# Altium PCB HOC_LENH_STM8S.PcbDoc
Units mm, origin at the board's own origin, x right, y up, seen from the top; angles counter-clockwise.
Board outline 68.96 x 54.48 mm, 2 copper layers (Top Layer, Bottom Layer); 28 components, 22 nets, 97 pads, 12 vias.
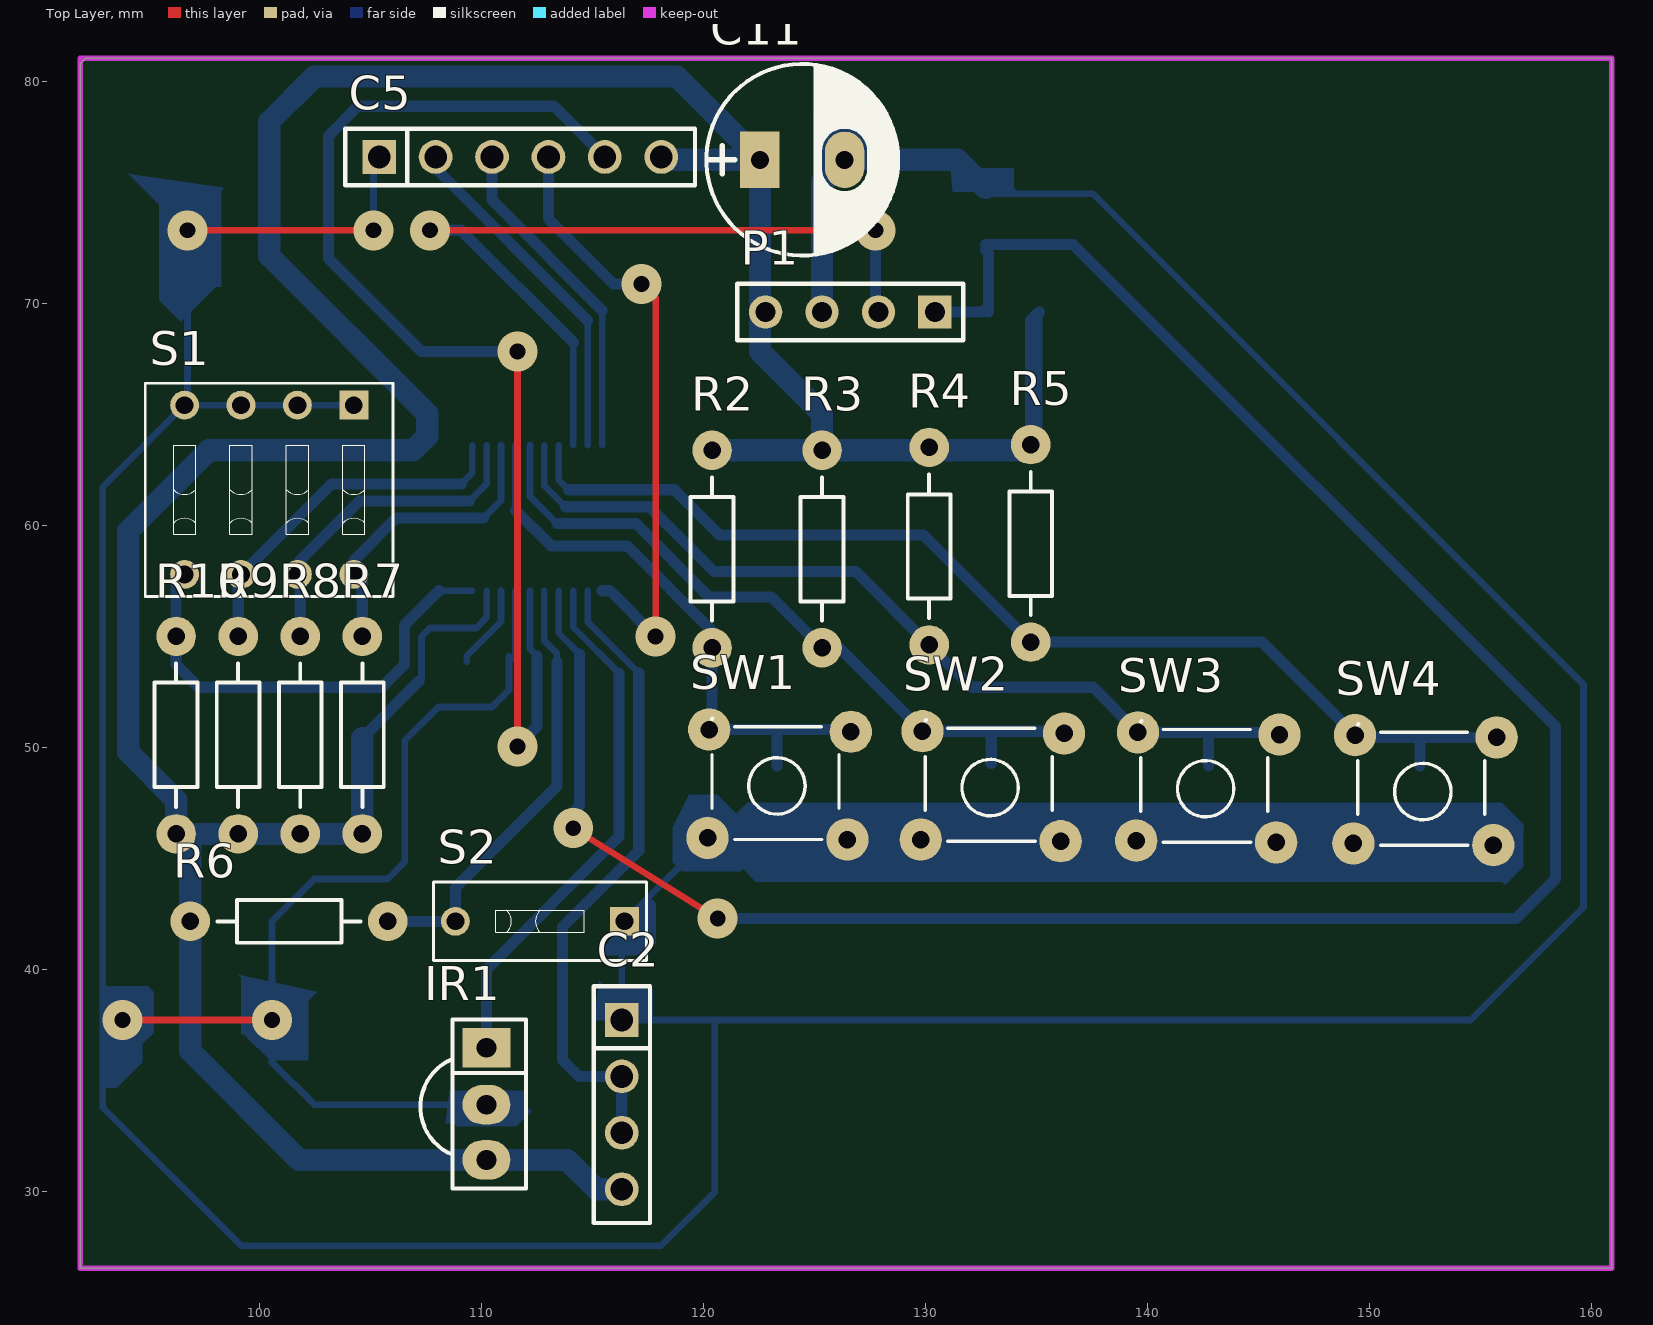
[diagram p0: Top Layer view]
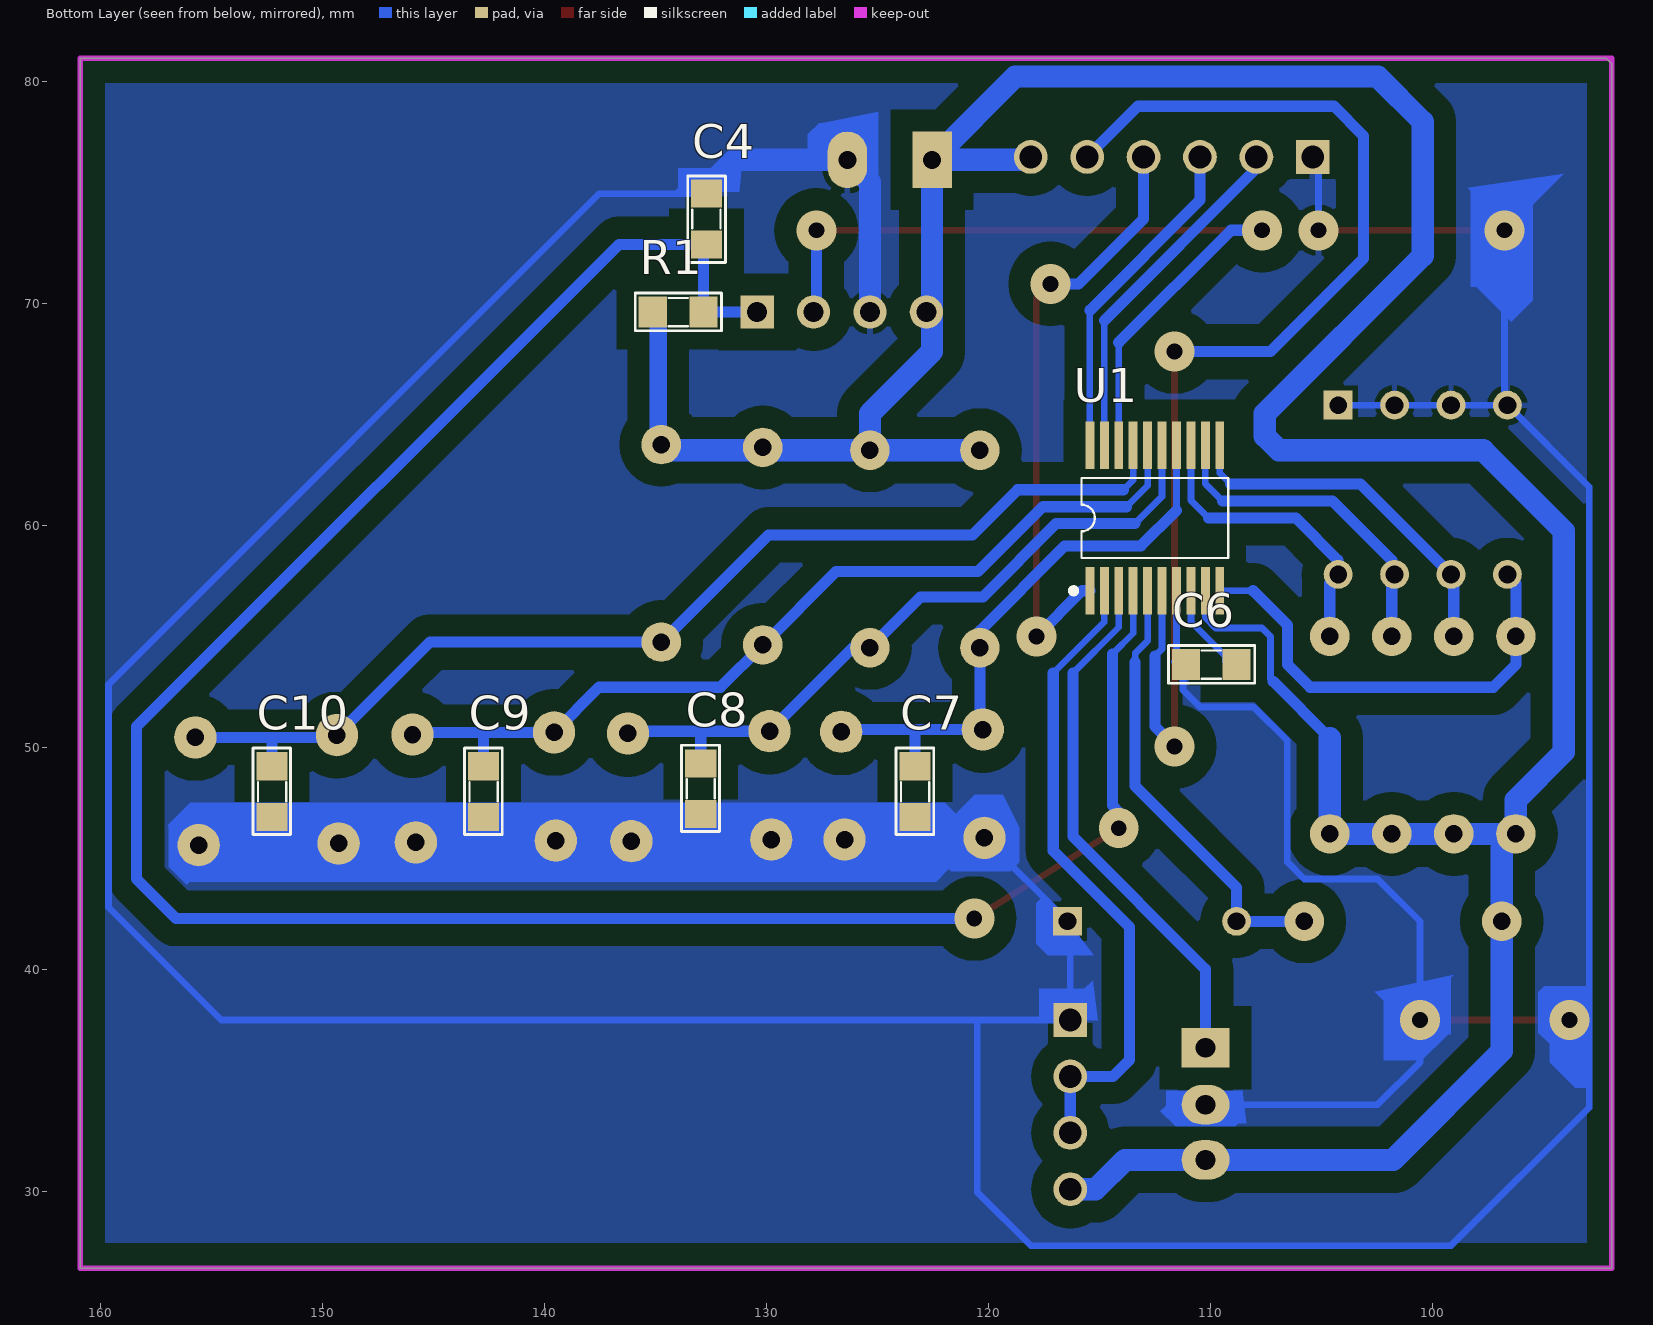
[diagram p1: Bottom Layer view, seen from below]
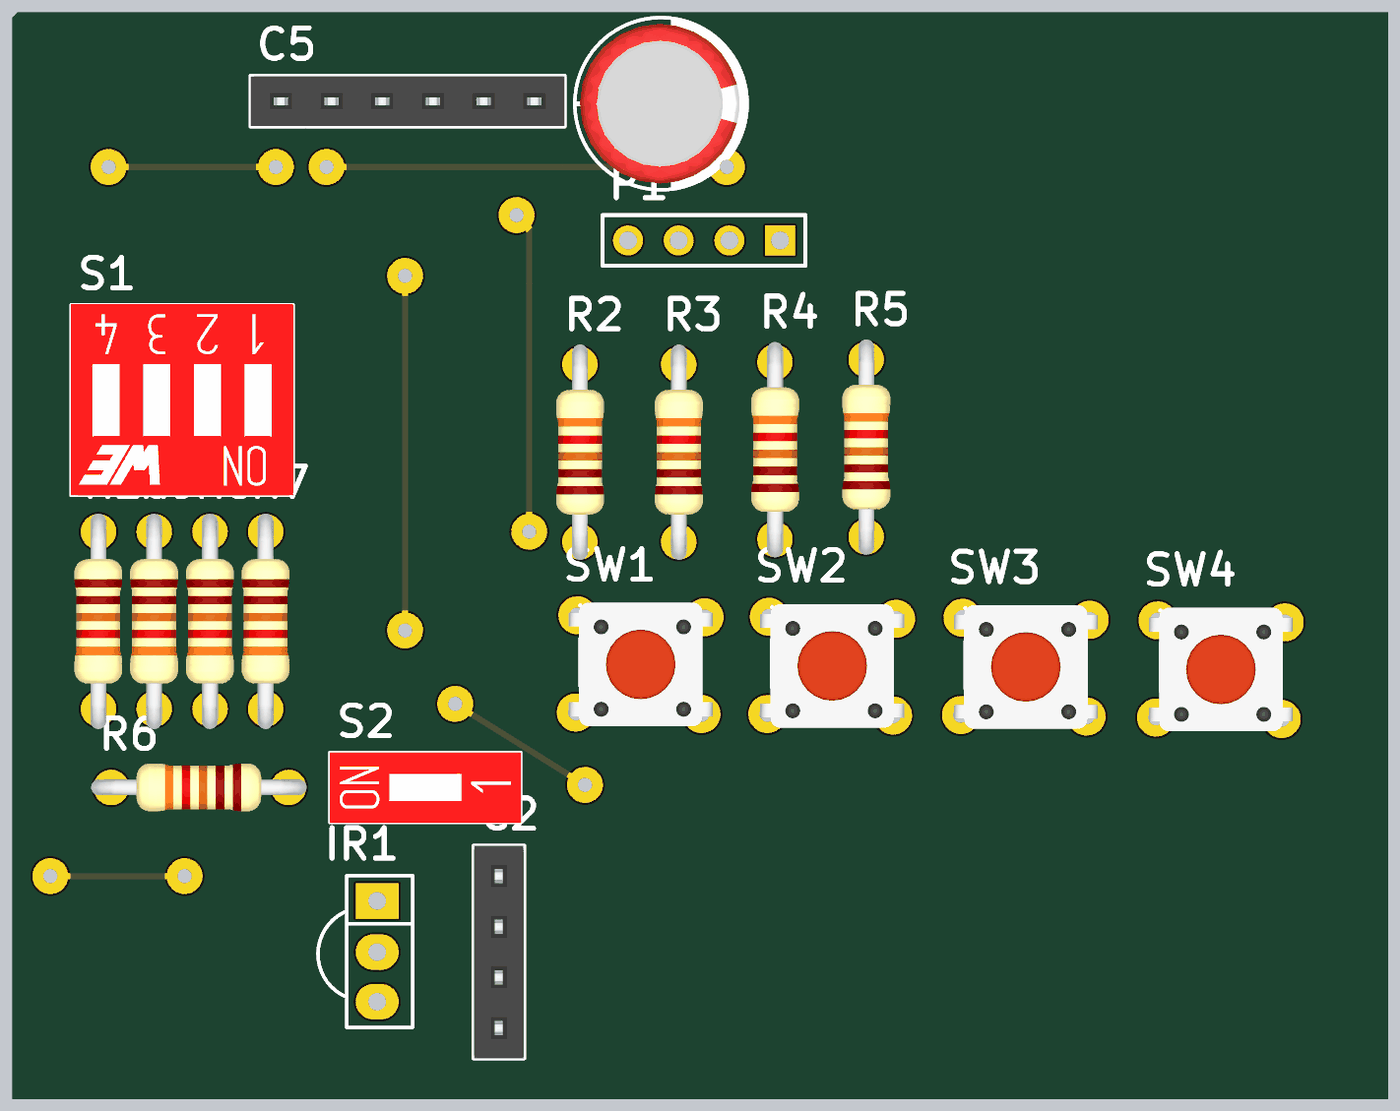
[diagram p2: 3D render of the assembled board from above, using the file's embedded part models]
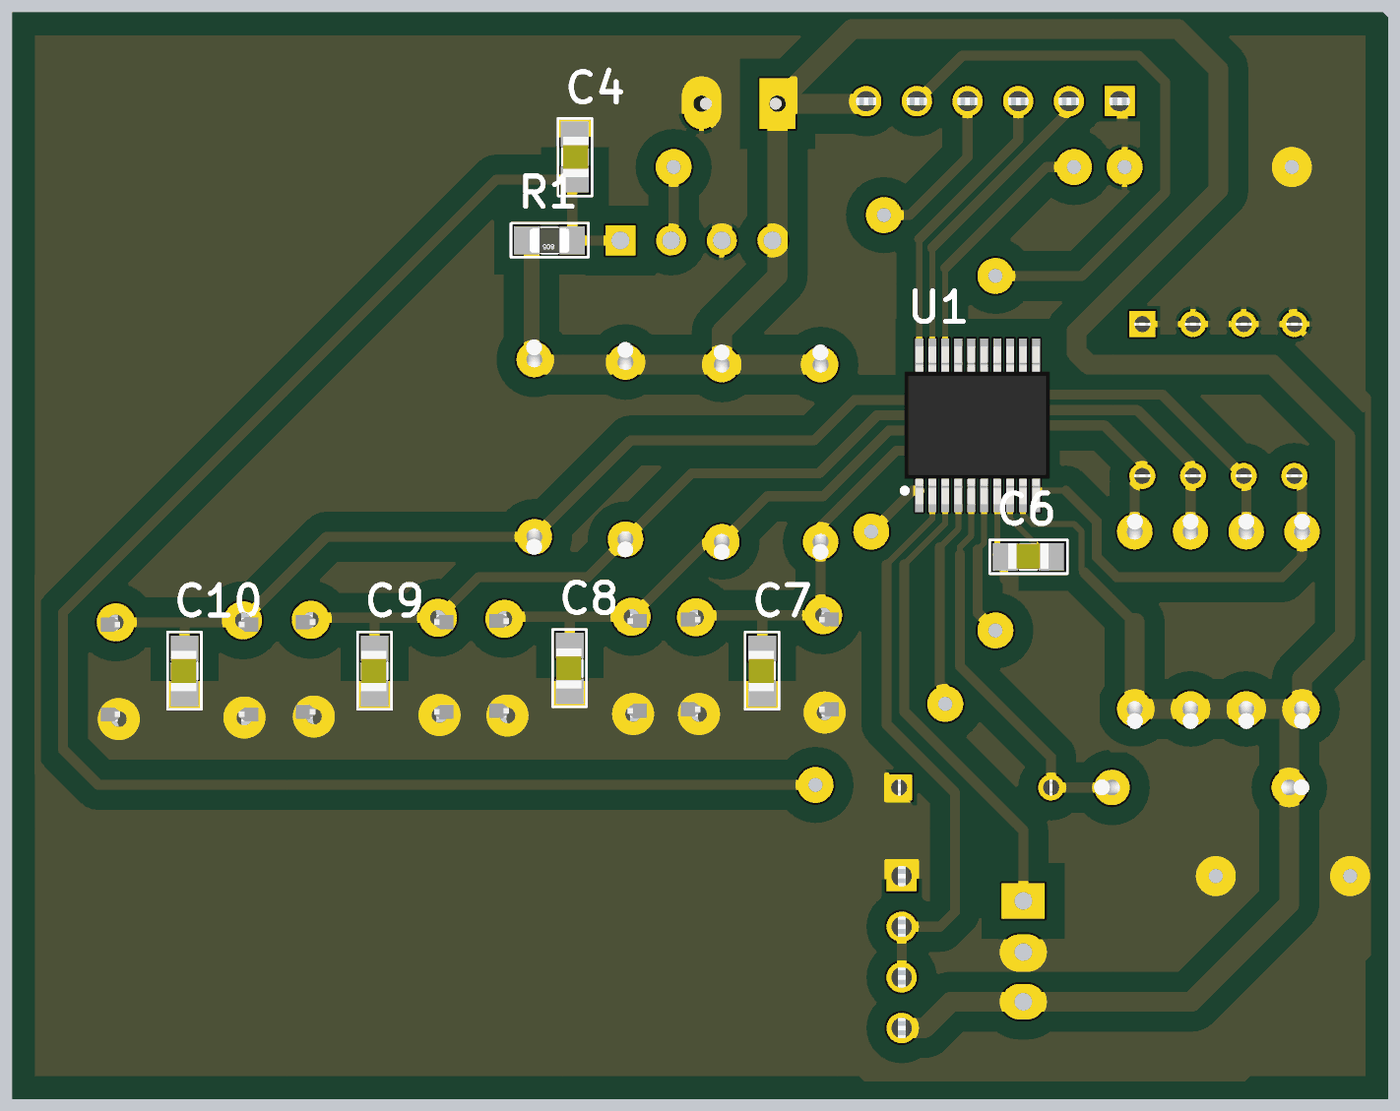
[diagram p3: 3D render of the assembled board from below, using the file's embedded part models]

## Layer stack, top to bottom
Top Solder: solder mask 0.0102, Solder Resist, Dk 3.5
Top Layer: signal copper 0.0356
Dielectric 1: dielectric 0.32, FR-4, Dk 4.8
Bottom Layer: signal copper 0.0356
Bottom Solder: solder mask 0.0102, Solder Resist, Dk 3.5

## Board outline
91.948,26.543 91.948,80.772 92.202,81.026 160.909,81.026 160.909,26.543

## Design rules (kind name [scope] priority, off if disabled: settings)
Clearance [All] p1: gap=0.2 ignorepadtopadclearanceinfootprint=FALSE
PolygonConnect [All] p1: connectstyle=Relief reliefconductorwidth=0.254 reliefentries=4 polygonreliefangle="90 Angle" airgapwidth=0.254
RoutingVias [All] p1: holewidth=0.711 width=1.8 viastyle="Through Hole" minholewidth=0.711 minwidth=1.8 maxholewidth=0.711 maxwidth=1.8
SolderMaskExpansion [All] p1: expansion=0.102
Width [All] p1: maxlimit=1 minlimit=0.3 preferedwidth=0.5
30 further rules are at their usual default settings.

## Components (designator, comment, footprint, x,y, rotation, side; value= is the part's Value field where it differs from the comment)
C2 "JP4" JP4-C1T 116.332,37.719 r270 top
C4 "104" 0805 132.715,73.787 r90 bottom value=103
C5 "JP6" JP6-C1T 105.41,76.581 r0 top
C6 "104" 0805 109.982,53.721 r0 bottom value=103
C7 "104" 0805 123.317,48.006 r270 bottom value=103
C8 "104" 0805 132.969,48.133 r270 bottom value=103
C9 "104" 0805 142.748,48.006 r270 bottom value=103
C10 "104" 0805 152.273,48.006 r270 bottom value=103
C11 "1000uF/16V" CP1.5/3.4 122.555,76.454 r0 top
IR1 "IR" IR 110.236,33.934 r270 top
P1 "Header 4" HDR1X4 130.429,69.596 r180 top
R1 "10k" SM-RES-0805 132.842,69.596 r0 bottom value="R1/4W - 1K"
R2 "10k" R1/4W 120.396,63.373 r270 top value="R1/4W - 1K"
R3 "10k" R1/4W 125.349,63.373 r270 top value="R1/4W - 1K"
R4 "10k" R1/4W 130.175,63.5 r270 top value="R1/4W - 1K"
R5 "10k" R1/4W 134.747,63.627 r270 top value="R1/4W - 1K"
R6 "10k" R1/4W 96.901,42.164 r0 top value="R1/4W - 1K"
R7 "10k" R1/4W 104.648,46.101 r90 top value="R1/4W - 1K"
R8 "10k" R1/4W 101.854,46.101 r90 top value="R1/4W - 1K"
R9 "10k" R1/4W 99.06,46.101 r90 top value="R1/4W - 1K"
R10 "10k" R1/4W 96.266,46.101 r90 top value="R1/4W - 1K"
S1 "=partNo" SW-DIP4 100.457,61.595 r180 top
S2 "=partNo" SW-DIP1-1 112.649,42.164 r90 top
SW1 "SW" SW4 126.492,45.847 r180 top value="Button chip 4 pin"
SW2 "SW" SW4 136.093,45.771 r180 top value="Button chip 4 pin"
SW3 "SW" SW4 145.796,45.72 r180 top value="Button chip 4 pin"
SW4 "SW" SW4 155.575,45.593 r180 top value="Button chip 4 pin"
U1 "STM8S003F3" SSOP20 112.522,60.325 r180 bottom

## Footprints (in the part's own frame and the unit in brackets; to place one, negate y for a bottom-side part, rotate by r counter-clockwise, add the part's x,y. Pads: shape width x height; smd on the part's side, far side on the other; paste and mask are expansions set on the pad)
0805 [mil] "Compoment SMD 80x50mil"
  rect 50x55 smd: 1(-45,0) 2(45,0)
  silkscreen extent -77,-34 76,33, body extent -40,-27 40,23, height 24
CP1.5/3.4 [mil] "Tu hoa 220->470uF,16V, 470uF/16V,25V"
  rect 70x100 hole 32: 1(0,0)
  oval 70x100 hole 32: 2(150,0)
  silkscreen extent -95,-170 245,170, body extent -85,-157 230,157, height 446
HDR1X4 [mm] "Connector; Header; 4 Position"
  rect 1.5x1.5 hole 0.9: 1(0,0)
  round 1.5 hole 0.9: 2(2.54,0) 3(5.08,0) 4(7.62,0)
  silkscreen extent -1.27,-1.27 8.89,1.27, body extent -1.27,-1.27 8.89,1.27, height 7
IR [mil] "Receiver Infared IC"
  rect 70x85 hole 35: 1(-100,0)
  oval 70x85 hole 35: 2(1,0) 3(99,0)
  silkscreen extent -150,-117 150,70
JP4-C1T [mm] "4 row, straight, gold plating"
  rect 1.52x1.52 hole 1.02: 1(0,0)
  round 1.52 hole 1.02: 2(2.54,0) 3(5.08,0) 4(7.62,0)
  silkscreen extent -1.52,-1.27 9.14,1.27, body extent -1.52,-1.25 9.14,1.25, height 8.51
JP6-C1T [mm] "6 row, straight, gold plating"
  rect 1.52x1.52 hole 1.02: 1(0,0)
  round 1.52 hole 1.02: 2(2.54,0) 3(5.08,0) 4(7.62,0) 5(10.16,0) 6(12.7,0)
  silkscreen extent -1.52,-1.27 14.22,1.27, body extent -1.52,-1.25 14.22,1.25, height 8.51
R1/4W [mil] "R 1/4W, 2 Pin, 350mil"
  round 70 hole 31: 1(0,0) 2(350,0)
  silkscreen extent 48,-38 302,38, body extent -40,-47 386,47, height 111
SM-RES-0805 [mil]
  rect 50x55 smd: 1(0,0) 2(90,0)
  silkscreen extent -32,-34 121,33, body extent 6,-25 84,25, height 31
SSOP20 [mm] "(STM8S003)"
  rect 0.4x2.15 smd: 1(-2.925,-3.275) 2(-2.275,-3.275) 3(-1.625,-3.275) 4(-0.975,-3.275) 5(-0.325,-3.275) 6(0.325,-3.275) 7(0.975,-3.275) 8(1.625,-3.275) 9(2.275,-3.275) 10(2.925,-3.275) 11(2.925,3.275) 12(2.275,3.275) 13(1.625,3.275) 14(0.975,3.275) 15(0.325,3.275) 16(-0.325,3.275) 17(-0.975,3.275) 18(-1.625,3.275) 19(-2.275,3.275) 20(-2.925,3.275)
  silkscreen extent -3.78,-3.4 3.3,1.8, body extent -3.68,-3.95 3.62,3.95, height 1.79
SW4 [mil] "SW button 4pin, 250 x250 mil"
  round 75 hole 31: 1(0,0) 2(245,-195) 3(248,-3) 4(-6,-191)
  silkscreen extent 15,-215 240,0, body extent -36,-220 276,24, height 276
SW-DIP1-1 [mm] "01p, 2.54mm Pitch, Horizontal, Box Type, THT, flat Actuator, red, without Tape, Tube"
  rect 1.3x1.3 hole 0.8: 1(0,-3.81)
  round 1.3 hole 0.8: 2(0,3.81)
  silkscreen extent -1.77,-4.8 1.77,4.8, body extent -1.77,-4.8 1.77,4.8, height 5.4
SW-DIP4 [mm] "04p, 2.54mm Pitch, Horizontal, Box Type, THT, flat Actuator, red, without Tape, Tube"
  rect 1.3x1.3 hole 0.8: 1(-3.81,-3.81)
  round 1.3 hole 0.8: 2(-1.27,-3.81) 3(1.27,-3.81) 4(3.81,-3.81) 5(3.81,3.81) 6(1.27,3.81) 7(-1.27,3.81) 8(-3.81,3.81)
  silkscreen extent -5.58,-4.8 5.58,4.8, body extent -5.58,-4.8 5.58,4.8, height 5.4

## Part data
C2: "WR-PHD 2.54 mm Angled Socket Header", Manufacturer="Würth Elektronik eiSos GmbH", partNo=613004143121, ComponentLink1 Description=Manufacturer, ComponentLink1URL=http://www.we-online.com, ComponentLink2 Description=Datasheet, ComponentLink2URL=http://katalog.we-online.de/em/datasheet/6130xx143121.pdf, Created by="Karrer Zheng", Created Date="29 March 2013", NoPins=04
C4 C6 C7 C8 C9 C10: library part CM, "Cap SMD"
C5: "WR-PHD 2.54 mm Angled Socket Header", Manufacturer="Würth Elektronik eiSos GmbH", partNo=613006143121, ComponentLink1 Description=Manufacturer, ComponentLink1URL=http://www.we-online.com, ComponentLink2 Description=Datasheet, ComponentLink2URL=http://katalog.we-online.de/em/datasheet/6130xx143121.pdf, Created by="Karrer Zheng", Created Date="29 March 2013", NoPins=06
C11: library part CP4, "Cap 1000uF/16V - 220uF/50V", Description 1="2200uF-3300uF/6,3V - 1000uF-2200uF/10V", Description 2="1000uF/16V - 470uF => 1000uF/25V - 100uF/100V", Description 3=330uF>470uF/35V_220uF>470uF/50V_10uF>22uF/250V, Description 4="220uF => 330uF/63V - 10uF =>33uF/160 - 200V", Description 5="4,7uF>10uF/250V_3,3uF>10uF/400V - 2,2uF>4,7uF/450V"
IR1: "Receiver Infraed IC"
P1: "Header, 4-Pin", LatestRevisionDate=17-Jul-2002, LatestRevisionNote="Re-released for DXP Platform.", Publisher="Altium Limited"
R1 R2 R3 R4 R5 R6 R7 R8 R9 R10: library part R1/4W, "Resistor 1/4W"
S1: library part SWDIP4, "WS-DITV 2.54 mm small compact THT flat actuator with top tape", Manufacturer="Wurth Elektronik", Part No.=418127160904, ComponentLink1 Description=Manufacturer, ComponentLink1URL=http://www.we-online.com, ComponentLink2 Description=Datasheet, ComponentLink2URL=http://katalog.we-online.de/em/datasheet/4181271609xx.pdf, Created by="Baojun Chen", Created Date=Dec.2015, Pole=04
S2: library part SWDIP1, "WS-DITV 2.54 mm small compact THT flat actuator with top tape", Manufacturer="Wurth Elektronik", Part No.=418127160901, ComponentLink1 Description=Manufacturer, ComponentLink1URL=http://www.we-online.com, ComponentLink2 Description=Datasheet, ComponentLink2URL=http://katalog.we-online.de/em/datasheet/4181271609xx.pdf, Created by="Baojun Chen", Created Date=Dec.2015, Pole=01
SW1 SW2 SW3 SW4: library part SW4, "Switch button 4 pin"

## Via types
v1: diameter 1.8, hole 0.711, Top Layer to Bottom Layer, 12 vias

## Nets (pads, with @x,y where several pads share a name; then routed paths per layer and width w, separated by ;. In a path a pad name is that pad's centre, name@x,y a point inside that pad or via, vN(x,y) a via of type N, cw(c..) or ccw(c..) an arc to the next point about the centre after c; other vN are vias at no path point)
"BUTTON 1": C7.1 R2.2 SW1.2 SW1.4 U1.14 | length 26.5
  Bottom Layer w0.3: 111.547,60.665 U1.14
  Bottom Layer w0.5: 111.547,60.665 113.157,59.055 116.586,59.055 120.396,55.245 R2.2 120.396,50.927 SW1.2 126.543,50.8 SW1.4 ; C7.1 123.317,50.711
"BUTTON 2": C8.1 R3.2 SW2.2 SW2.4 U1.15 | length 32.2
  Bottom Layer w0.3: U1.15 112.197,61.285 113.411,60.071
  Bottom Layer w0.5: 113.411,60.071 116.967,60.071 120.269,56.769 123.063,56.769 R3.2 126.111,54.483 SW2.2 132.969,50.724 ; C8.1 132.969,50.724 ; SW2.4 136.144,50.724 132.969,50.724
"BUTTON 3": C9.1 R4.2 SW3.2 SW3.4 U1.16 | length 41.1
  Bottom Layer w0.3: U1.16 112.847,61.778 113.792,60.833 ; 142.621,50.673 142.748,50.546
  Bottom Layer w0.5: 113.792,60.833 117.561,60.833 120.482,57.912 126.873,57.912 R4.2 132.08,52.705 137.541,52.705 SW3.2 142.621,50.673 145.847,50.673 SW3.4 ; C9.1 142.748,50.546
"BUTTON 4": C10.1 R5.2 SW4.2 SW4.4 U1.17 | length 53.5
  Bottom Layer w0.3: U1.17 113.497,62.028 113.93,61.595 ; 152.146,50.546 155.626,50.546 SW4.4 ; 152.248,50.444 152.273,50.419
  Bottom Layer w0.5: 113.93,61.595 118.704,61.595 120.736,59.563 129.921,59.563 R5.2 145.161,54.737 SW4.2 149.454,50.444 152.248,50.444 SW4.4 ; C10.1 152.273,50.419
GND: C2.1 C4.2 C5.1 C6.2 C7.2 C8.2 C9.2 C10.2 C11.2 IR1.2 P1.3 S1.1 S1.2 S1.3 S1.4 S2.1 SW1.1 SW1.3 SW2.1 SW2.3 SW3.1 SW3.3 SW4.1 SW4.3 U1.7 | length 301.1
  Top Layer w0.3: v1(93.853,37.719) v1(100.584,37.719) ; v1(96.774,73.279) v1(105.156,73.279)
  Bottom Layer w0.3: v1(96.774,73.279) 96.774,65.532 S1.4 ; S1.1 S1.2 S1.3 S1.4 ; v1(105.156,73.279) 105.156,76.327 C5.1 ; IR1.2 102.489,33.909 100.584,35.814 v1(100.584,37.719) 100.584,42.164 102.489,44.069 105.791,44.069 106.553,44.831 106.553,50.292 108.077,51.816 110.49,51.816 111.252,52.578 C6.2@111.252,54.102 ; U1.7 111.547,53.934 C6.2@111.633,53.848 ; C7.2 123.317,46.05 123.19,45.923 ; C4.2@132.715,75.184 C4.2 137.541,74.93 159.639,52.832 159.639,42.799 154.559,37.719 120.523,37.719 ; C8.2 132.969,45.923 ; C9.2 142.748,45.923 ; C10.2 152.273,46.05 152.4,45.923 ; SW4.1 155.245,45.923 152.4,45.923 ; S1.4 92.964,61.722 92.964,33.782 99.187,27.559 118.11,27.559 120.523,29.972 120.523,37.719 ; 120.523,37.719 C2.1 116.332,42.037 S2.1 120.193,45.898 SW1.3 123.19,45.923 ; 123.19,45.923 132.969,45.923 ; 132.969,45.923 142.748,45.923 ; 142.748,45.923 152.4,45.923
  Bottom Layer w1: P1.3 125.349,75.438 C11.2 131.445,76.454 C4.2@132.715,75.184
IR_SIGN: IR1.1 U1.3 | length 23.9
  Bottom Layer w0.3: U1.3 114.147,55.402 116.205,53.344
  Bottom Layer w0.5: IR1.1 110.236,40.005 116.205,45.974 116.205,53.344
NetC6_1: C6.1 U1.8 | length 3.8
  Bottom Layer w0.3: C6.1@109.347,53.848 109.347,54.102 110.897,55.652 U1.8
NetDIO1_1: 
NetLED1_1: 
NRST: C4.1 P1.1 R1.1 U1.4 | length 104.3
  Top Layer w0.3: v1(114.147,46.355) v1(120.65,42.291)
  Bottom Layer w0.3: U1.4 113.497,55.133 114.427,54.203 ; C4.1@132.715,72.39 C4.1
  Bottom Layer w0.5: v1(114.147,46.355) 114.147,47.091 114.427,47.371 114.427,54.203 ; v1(120.65,42.291) 156.591,42.291 158.369,44.069 158.369,50.927 136.652,72.644 C4.1 ; P1.1 132.588,69.596 R1.1@132.715,69.723 ; C4.1@132.715,72.39 132.842,72.263 R1.1
RELAY1: C5.2 U1.19 | length 15.8
  Bottom Layer w0.3: U1.19 114.797,69.226
  Bottom Layer w0.5: C5.2 107.95,76.073 114.797,69.226
RELAY2: C5.3 U1.20 | length 15
  Bottom Layer w0.3: U1.20 115.447,69.678
  Bottom Layer w0.5: C5.3 110.49,74.635 115.447,69.678
RELAY3: C5.4 U1.1 | length 27.6
  Top Layer w0.3: v1(117.221,70.866) 117.856,70.231 v1(117.856,54.991)
  Bottom Layer w0.5: C5.4 113.03,73.787 115.951,70.866 v1(117.221,70.866) ; U1.1 115.797,57.05 v1(117.856,54.991)
RELAY4: C5.5 U1.6 | length 55
  Top Layer w0.3: v1(111.633,50.038) v1(111.633,67.818)
  Bottom Layer w0.3: U1.6 112.197,54.427 112.522,54.102
  Bottom Layer w0.5: v1(111.633,50.038) 112.522,50.927 112.522,54.102 ; v1(111.633,67.818) 107.315,67.818 103.124,72.009 103.124,77.532 104.459,78.867 113.284,78.867 C5.5
RF_SIGN: C2.2 C2.3 U1.2 | length 29
  Bottom Layer w0.3: U1.2 114.797,55.637 117.094,53.34
  Bottom Layer w0.5: C2.3 C2.2 114.401,35.179 113.665,35.915 113.665,41.91 117.094,45.339 117.094,53.34
STT_RELAY1: R7.2 S1.8 U1.13 | length 13.8
  Bottom Layer w0.3: 110.109,60.325 110.897,61.113 U1.13
  Bottom Layer w0.5: R7.2 104.648,57.404 S1.8 104.267,58.42 106.172,60.325 110.109,60.325
STT_RELAY2: R8.2 S1.7 U1.12 | length 15
  Bottom Layer w0.3: 109.474,61.087 110.247,61.86 U1.12
  Bottom Layer w0.5: R8.2 101.854,58.42 104.521,61.087 109.474,61.087
STT_RELAY3: R9.2 S1.6 U1.11 | length 16.4
  Bottom Layer w0.3: 109.104,61.86 109.597,62.353 U1.11
  Bottom Layer w0.5: R9.2 99.06,57.658 S1.6 103.262,61.86 109.104,61.86
STT_RELAY4: R10.2 S1.5 U1.10 | length 20.8
  Bottom Layer w0.3: 108.104,57.05 U1.10
  Bottom Layer w0.5: S1.5 96.266,57.404 R10.2 96.266,53.721 97.282,52.705 105.537,52.705 106.553,53.721 106.553,55.499 108.104,57.05
SWIM: P1.2 U1.18 | length 37
  Top Layer w0.3: v1(107.696,73.279) v1(127.762,73.279)
  Bottom Layer w0.3: U1.18 114.147,68.221
  Bottom Layer w0.5: v1(107.696,73.279) 109.089,73.279 114.147,68.221 ; v1(127.762,73.279) 127.762,69.723 P1.2
SWITCH_MODE: R6.2 S2.2 U1.5 | length 20.1
  Bottom Layer w0.3: U1.5 112.847,54.793 113.411,54.229 113.411,53.848
  Bottom Layer w0.5: R6.2 S2.2 108.839,43.688 113.411,48.26 113.411,53.848
VCC: C2.4 C5.6 C11.1 IR1.3 P1.4 R1.2 R2.1 R3.1 R4.1 R5.1 R6.1 R7.1 R8.1 R9.1 R10.1 U1.9 | length 175.9
  Bottom Layer w0.3: 107.188,52.959 107.315,53.086 107.315,54.991 107.696,55.372 109.783,55.372 110.247,55.836 U1.9 ; C5.6 C11.1@122.428,76.581 ; R5.1 135.128,64.008 R1.2
  Bottom Layer w0.5: 104.648,50.419 107.188,52.959 ; R5.1 134.747,69.215 R1.2
  Bottom Layer w1: 104.648,50.419 R7.1 R8.1 R9.1 R10.1 ; C2.4 115.189,30.099 113.868,31.42 IR1.3 101.803,31.42 96.901,36.322 R6.1 96.901,45.466 R10.1 ; C5.6 118.237,76.454 C11.1 122.555,67.818 125.349,65.024 R3.1 ; R2.1 R3.1 ; C11.1@122.428,76.581 118.81,80.199 102.489,80.199 100.457,78.167 100.457,72.136 107.569,65.024 107.569,64.008 106.934,63.373 97.738,63.373 94.107,59.742 94.107,49.784 96.266,47.625 R10.1 ; R5.1 134.493,63.373 R3.1

## Polygon pours and split planes (outlines as drawn)
GND on Bottom Layer "Bottom Layer-No Net" (solid, pour order 6): 91.948,81.026 91.948,26.543 160.909,26.543 160.909,81.026
GND on Bottom Layer "Bottom Layer-No Net" (solid, pour order 2): 161.798,81.153

## Keep-outs
Keep-Out Layer:
  lines w0.254: 91.948,26.543 160.909,26.543 160.909,81.026 91.948,81.026 91.948,26.543

## Other copper
Bottom Layer:
  region net GND: 108.585,34.585 108.626,34.544 112.014,34.544 112.014,33.865 112.268,33.611 111.584,32.927 108.904,32.927 108.761,33.07 108.397,33.07
  region net GND: 92.964,39.243 92.964,34.671 93.599,34.671 94.742,35.814 94.742,36.649 95.25,37.157 95.25,38.97 94.977,39.243
  region net GND: 99.06,39.751 99.187,39.624 99.187,37.084 99.314,37.084 100.584,35.814 100.685,35.915 102.224,35.915 102.224,38.597 102.616,38.989
  region net GND: 131.23,75.008 134.161,75.008 133.985,75.184 133.985,76.073 131.252,76.073 131.125,76.2
  region net GND: 124.968,78.613 124.968,75.311 125.222,75.311 126.492,76.581 128.143,76.581 128.143,77.597 127.635,78.105 127.546,78.105
  region net GND: 94.107,75.819 95.504,74.422 95.504,70.137 96.473,69.168 98.044,70.739 98.292,70.739 98.292,75.057 98.425,75.19
  region net GND: 115.094,37.719 117.602,37.719 117.729,37.846 117.729,39.116 115.699,39.116 115.318,39.497
  region net GND: 116.395,42.1 117.561,43.266 117.856,42.971 117.856,41.148 117.348,40.64 115.278,40.64
  region net GND: 119.38,47.855 120.631,47.855 121.489,46.996 121.991,47.498 155.956,47.498 156.972,46.482 156.917,46.427 156.917,44.622 156.11,43.815 155.983,43.942 122.371,43.942 121.793,44.52 121.699,44.425 119.026,44.425 118.618,44.834 118.618,46.405